# EAGLE board motor-driver (EAGLE 7.3.0)
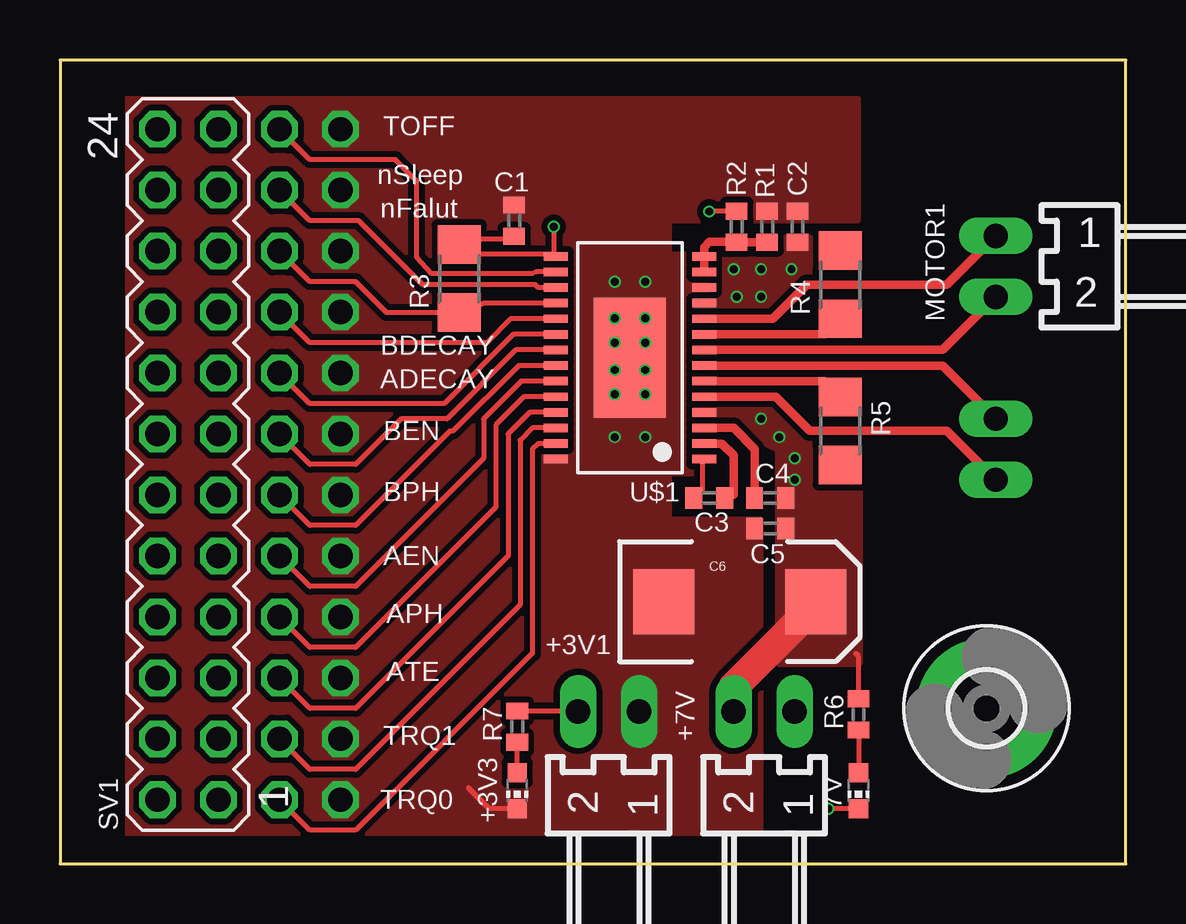
[diagram p0: board, top side]
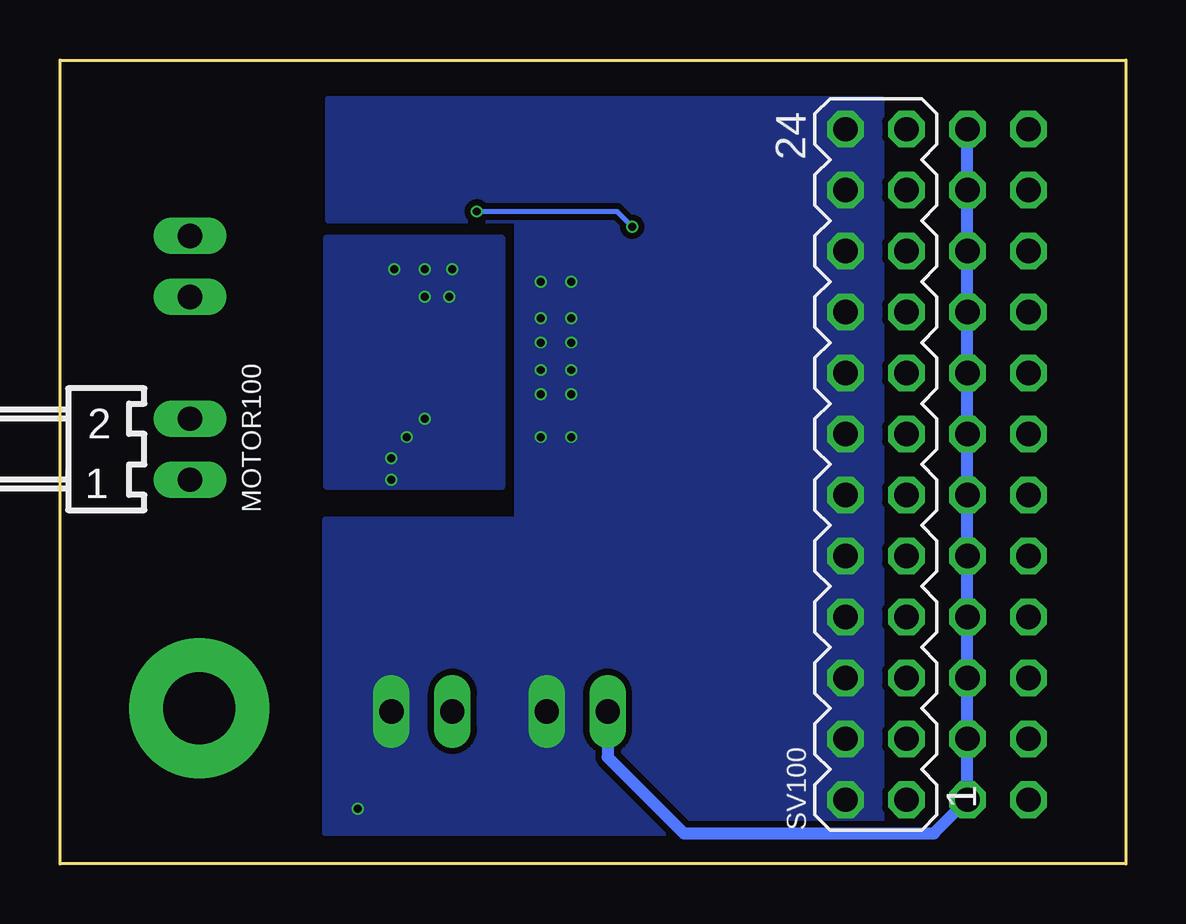
[diagram p1: board, bottom side, seen from below]

Size 44.41 x 33.49 mm. Coordinates in mm from the lower left corner, seen from the top.
Outline: 0,0 44.41,0 44.41,33.49 0,33.49 0,0
Copper layers (1*16): Top 0.035mm / dielectric 1.5mm / Bottom 0.035mm
Design rules "EagleRules-2-Layer-Shep": minimum track width 6mil, minimum drill 12mil, track to track 6mil, track to pad 6mil, pad to pad 6mil, via to via 6mil, smd to smd 0mil, copper to edge 10mil, drill to drill 10mil, minimum pad ring 2mil, minimum via ring 2mil, stop-mask expansion 2mil, vias tented up to drill 100mil, thermal gap 10mil
Net classes: 0 default: width 0.203 mm, drill 0.33 mm, clearance 0.254 mm; 1 +3v3: width 0.203 mm, drill 0.33 mm, clearance 0.254 mm; 2 VM: width 0.508 mm, drill 0.533 mm, clearance 0.254 mm

## Footprints (pad centres in the part's own frame; a part is rotated, then mirrored left to right if it is on the bottom)
CHIP-LED0603 = smd 0.8 x 0.8: A 0,-0.75; C 0,0.75
7395-02 = drill 1.016 long: 1 1.27,0; 2 -1.27,0
C0402 = smd 0.7 x 0.9: 1 -0.65,0; 2 0.65,0
EIA7343 = smd 2.55 x 2.7: A 3.17,0; C -3.17,0
3,0-PAD = drill 3 pad 5.842: B3,0 0,0
R0402 = smd 0.7 x 0.9: 1 -0.65,0; 2 0.65,0
R1206 = smd 1.6 x 1.803: 1 -1.422,0; 2 1.422,0
MA12-2 = drill 1.016 octagon: 1 -13.97,-1.27; 2 -13.97,1.27; 3 -11.43,-1.27; 4 -11.43,1.27; 5 -8.89,-1.27; 6 -8.89,1.27; 7 -6.35,-1.27; 8 -6.35,1.27; 9 -3.81,-1.27; 10 -3.81,1.27; 11 -1.27,-1.27; 12 -1.27,1.27; 13 1.27,-1.27; 14 1.27,1.27; 15 3.81,-1.27; 16 3.81,1.27; 17 6.35,-1.27; 18 6.35,1.27; 19 8.89,-1.27; 20 8.89,1.27; 21 11.43,-1.27; 22 11.43,1.27; 23 13.97,-1.27; 24 13.97,1.27
TSSOP-28 = smd 0.35 x 1: 1 -4.225,-3.087; 2 -3.575,-3.087; 3 -2.925,-3.087; 4 -2.275,-3.087; 5 -1.625,-3.087; 6 -0.975,-3.087; 7 -0.325,-3.087; 8 0.325,-3.087; 9 0.975,-3.087; 10 1.625,-3.087; 11 2.275,-3.087; 12 2.925,-3.087; 13 3.575,-3.087; 14 4.225,-3.087; 15 4.225,3.087; 16 3.575,3.087; 17 2.925,3.087; 18 2.275,3.087; 19 1.625,3.087; 20 0.975,3.087; 21 0.325,3.087; 22 -0.325,3.087; 23 -0.975,3.087; 24 -1.625,3.087; 25 -2.275,3.087; 26 -2.925,3.087; 27 -3.575,3.087; 28 -4.225,3.087 | smd 5 x 3: EXP 0,0

## Placement (x,y rotation side)
7V  [CHIP-LED0603]  33.27,3.05 180 top
+3V1  22-05-7028-02  [7395-02]  22.86,6.35 0 top
+3V3  [CHIP-LED0603]  19.05,3.05 180 top
+7V  22-05-7028-02  [7395-02]  29.34,6.35 0 top
C1  0.1uF  [C0402]  18.92,26.8 90 top
C2  0.1uF  [C0402]  30.73,26.54 90 top
C3  0.1uF  [C0402]  27.05,15.24 0 top
C4  0.47uF  [C0402]  29.59,15.24 0 top
C5  0.1uF  [C0402]  29.59,13.97 180 top
C6  100uF  [EIA7343]  28.32,10.92 0 top
H1  MOUNT-PAD-ROUND3.0  [3,0-PAD]  38.61,6.48 0 top
MOTOR1  22-05-7028-02  [7395-02]  38.99,24.89 90 top
MOTOR100  22-05-7028-02  [7395-02]  38.99,17.27 270 bottom
R1  0.2  [R0402]  28.19,26.54 270 top
R2  0.2  [R0402]  29.46,26.54 90 top
R3  10K  [R1206]  16.64,24.38 90 top
R4  [R1206]  32.51,24.13 90 top
R5  [R1206]  32.51,18.03 270 top
R6  700  [R0402]  33.27,6.22 90 top
R7  330  [R0402]  19.05,5.71 90 top
SV1  [MA12-2]  5.33,16.64 90 top
SV100  [MA12-2]  10.41,16.64 90 bottom
U$1  DRV8881PPWPR  [TSSOP-28]  23.75,21.08 90 top

## Library data of the parts
7V +3V3 = led
+3V1 +7V MOTOR1 MOTOR100 = Son_of_Dark_Power; OC_FARNELL: 9731601; OC_NEWARK: unknown
C1-C5 R1-R7 = rcl
C6 = SparkFun-Capacitors; PROD_ID: CAP-07890
H1 = holes
SV1 SV100 = con-lstb; OC_FARNELL: unknown; OC_NEWARK: unknown
U$1 = motor-driver

## Nets
+3V3: +3V1.2 R7.2 SV1.1 SV1.3 SV1.5 SV1.7 SV1.9 SV1.11 SV1.13 SV1.15 SV1.17 SV1.19 SV1.21 SV1.23
+7V [VM]: +7V.2 C2.1 C4.2 C5.1 C6.A R6.2 U$1.4 U$1.11
ADECAY: SV100.15 U$1.20
AEN: SV100.9 U$1.23
APH: SV100.7 U$1.24
ATE: SV100.5 U$1.25
BDECAY: SV100.17 U$1.19
BEN: SV100.13 U$1.21
BPH: SV100.11 U$1.22
GND: 7V.C +3V1.1 +3V3.C +7V.1 C1.2 C2.2 C5.2 C6.C R2.2 SV100.2 SV100.4 SV100.6 SV100.8 SV100.10 SV100.12 SV100.14 SV100.16 SV100.18 SV100.20 SV100.22 SV100.24 U$1.12 U$1.28 U$1.EXP
N$1: R4.1 U$1.9
N$2: R5.1 U$1.6
N$3: MOTOR100.1 U$1.5
N$5: MOTOR100.2 U$1.7
N$6: MOTOR1.2 U$1.8
N$7: MOTOR1.1 U$1.10
N$8: C3.2 U$1.2
N$9: C3.1 U$1.1
N$10: C4.1 U$1.3
N$11: +3V3.A R7.1
N$12: 7V.A R6.1
N$18: R1.2 R2.1 U$1.13 U$1.14
NFAULT: R3.1 SV100.19 U$1.18
NSLEEP: SV100.21 U$1.17
TOFF: SV100.23 U$1.16
TRQ0: SV100.1 U$1.27
TRQ1: SV100.3 U$1.26
V3P3: C1.1 R1.1 R3.2 U$1.15

## Tracks (layer width: path | path; a pad name or v marks a point on that pad's centre or on a via)
+3V3
  Top 0.203: +3V1.2 19.07,6.35 R7.2
  Bottom 0.508: +3V1.2 21.59,4.45 18.41,1.27 8,1.27 SV1.1 SV1.3 SV1.5 SV1.7 SV1.9 SV1.11 SV1.13 SV1.15 SV1.17 SV1.19 SV1.21 SV1.23
+7V  (via drill 0.33)
  Top 0.203: R6.2 33.27,8.64 33.15,8.76
  Top 1.27: +7V.2 28.07,7.37 31.24,10.54
  other vias: 28.19,23.62 29.21,23.62 30.48,24.77 29.21,24.77 28.07,24.77 29.21,18.54 29.97,17.78 30.61,16.89 30.61,16
  pour Top (isolate 0.254, no thermals): 26.54,20.07 33.27,20.07 33.27,8.38 29.97,8.38 29.97,17.27 28.07,18.16 26.54,18.16
  pour Top (isolate 0.254, no thermals): 26.54,22.61 29.72,22.61 31.24,24.13 31.24,26.04 26.54,26.04
  pour Bottom: 26.04,26.04 33.27,26.04 33.27,15.75 26.04,15.75
ADECAY
  Top 0.203: SV100.15 10.41,19.18 16,19.18 18.88,22.06 U$1.20
AEN
  Top 0.203: SV100.9 10.41,11.56 12.32,11.56 17.65,16.89 17.65,18.54 19.22,20.11 U$1.23
APH
  Top 0.203: SV100.7 10.41,9.02 12.32,9.02 18.16,14.86 18.16,18.29 19.33,19.46 U$1.24
ATE
  Top 0.203: U$1.25 19.57,18.81 18.67,17.91 18.67,12.83 12.32,6.48 10.41,6.48 SV100.5
BDECAY
  Top 0.203: SV100.17 10.41,21.72 17.78,21.72 18.77,22.71 U$1.19
BEN
  Top 0.203: SV100.13 10.41,16.64 12.32,16.64 14.22,18.54 16.13,18.54 18.99,21.41 U$1.21
BPH
  Top 0.203: SV100.11 10.41,14.1 12.32,14.1 16.26,18.03 16.38,18.03 19.11,20.76 U$1.22
GND  (via drill 0.33)
  Top 0.203: 7V.C 32.02,2.3 v32,2.29 | +3V3.C 17.89,2.3 17.02,3.17
  other vias: 24.38,24.26 24.38,22.73 24.38,21.72 24.38,20.57 24.38,19.56 24.38,17.78 23.11,20.57 23.11,19.56 23.11,17.78 23.11,24.26 23.11,22.73 23.11,21.72
  pour Top (isolate 0.254, no thermals): 29.21,1.27 29.21,14.35 25.4,14.35 25.4,26.8 33.27,26.8 33.27,31.88 2.79,31.88 2.79,1.27
  pour Top (isolate 0.254, no thermals): 25.4,16.26 26.92,16.26 26.92,25.4 25.4,25.4
  pour Bottom (isolate 0.254, no thermals): 25.4,26.8 25.4,14.35 33.4,14.35 33.4,1.27 10.16,1.27 10.16,31.88 33.27,31.88 33.27,26.8
N$1
  Top 0.356: U$1.9 31.86,22.06 R4.1
N$2
  Top 0.356: U$1.6 31.86,20.11 R5.1
N$3
  Top 0.356: U$1.5 29.82,19.46 31.24,18.03 36.96,18.03 MOTOR100.1
N$5
  Top 0.356: U$1.7 36.77,20.76 MOTOR100.2
N$6
  Top 0.356: U$1.8 36.77,21.41 MOTOR1.2
N$7
  Top 0.356: U$1.10 29.69,22.71 31.11,24.13 36.96,24.13 MOTOR1.1
N$8
  Top 0.203: 28.07,15.37 27.83,15.37 C3.2
  Top 0.356: 28.07,15.37 28.07,17.02 27.58,17.51 U$1.2
N$9
  Top 0.203: 26.76,16.86 26.76,15.6 C3.1
  Top 0.356: U$1.1 26.76,16.86
N$10
  Top 0.356: U$1.3 28.07,18.16 28.96,17.27 28.96,15.26 C4.1
N$11
  Top 0.203: +3V3.A R7.1
N$12
  Top 0.203: R6.1 7V.A
N$18
  Top 0.356: U$1.13 U$1.14 26.84,25.69 27.05,25.91 28.18,25.91 R1.2 R2.1
NFAULT
  Top 0.203: U$1.18 17.67,23.36 R3.1 13.61,22.96 12.32,24.26 10.41,24.26 SV100.19
NSLEEP
  Top 0.203: SV100.21 10.41,26.8 12.45,26.8 15.11,24.13 19.81,24.13 19.93,24.01 U$1.17
TOFF
  Top 0.203: SV100.23 10.41,29.34 13.97,29.34 14.86,28.45 14.86,25.27 15.49,24.59 19.68,24.59 19.83,24.66 U$1.16
TRQ0
  Top 0.203: U$1.27 19.92,17.51 19.68,17.27 19.68,8.76 12.32,1.4 10.41,1.4 SV100.1
TRQ1
  Top 0.203: U$1.26 19.68,18.16 19.18,17.65 19.18,10.79 12.32,3.94 10.41,3.94 SV100.3
V3P3  (via drill 0.33)
  Top 0.203: R1.1 27.07,27.19 v27.05,27.18 | v20.57,26.54 20.57,25.39 | 20.57,25.39 U$1.15 | 20.57,25.39 17.43,25.39 R3.2 17.3,25.81 17.53,26.04 18.81,26.04 C1.1
  Bottom 0.203: v27.05,27.18 21.21,27.18 v20.57,26.54

## Text on the board
tPlace: TOFF | nSleep | nFalut | BDECAY | ADECAY | BEN | BPH | AEN | APH | ATE | TRQ1 | TRQ0